# EAGLE board WiFiSensorjj (EAGLE 7.3.0)
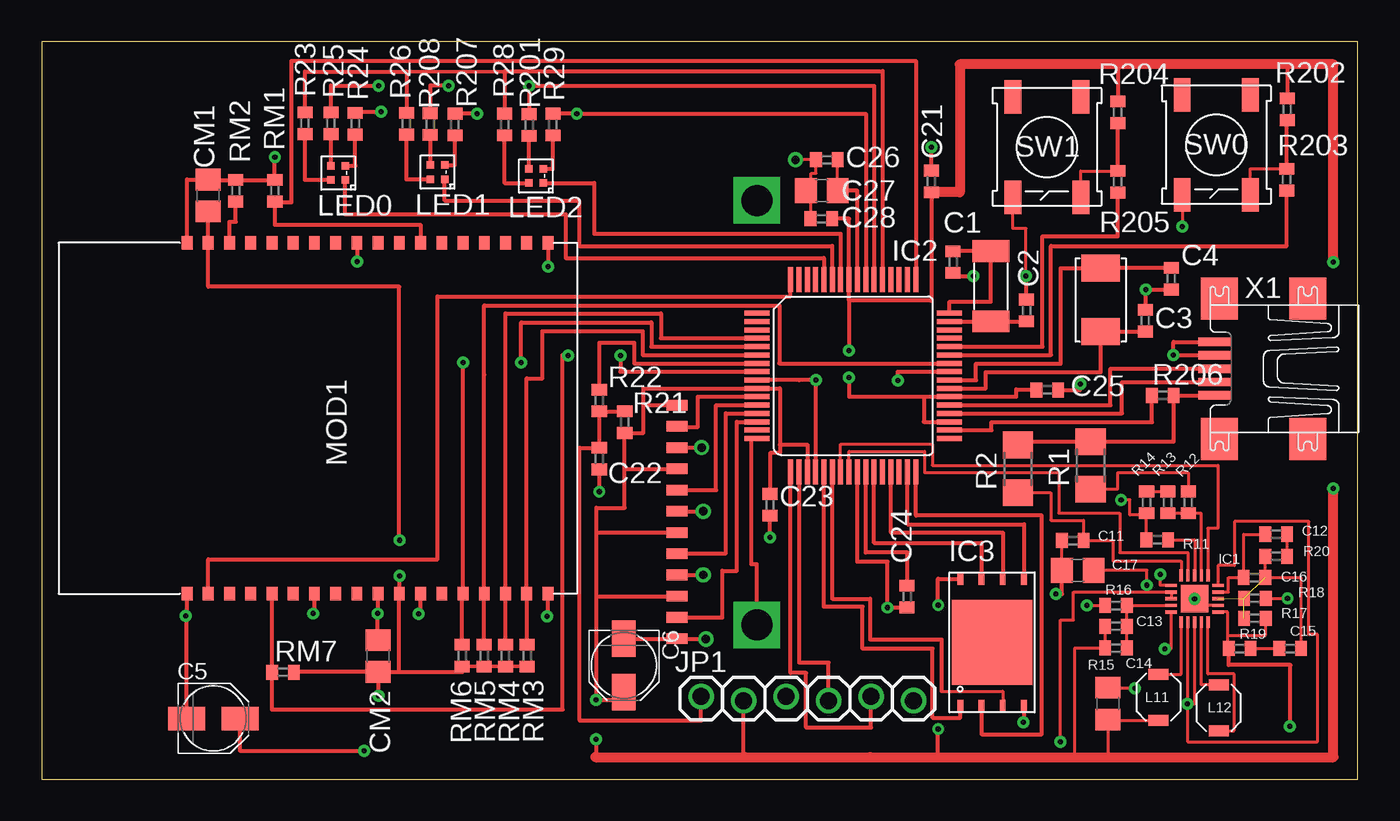
[diagram p0: board, top side]
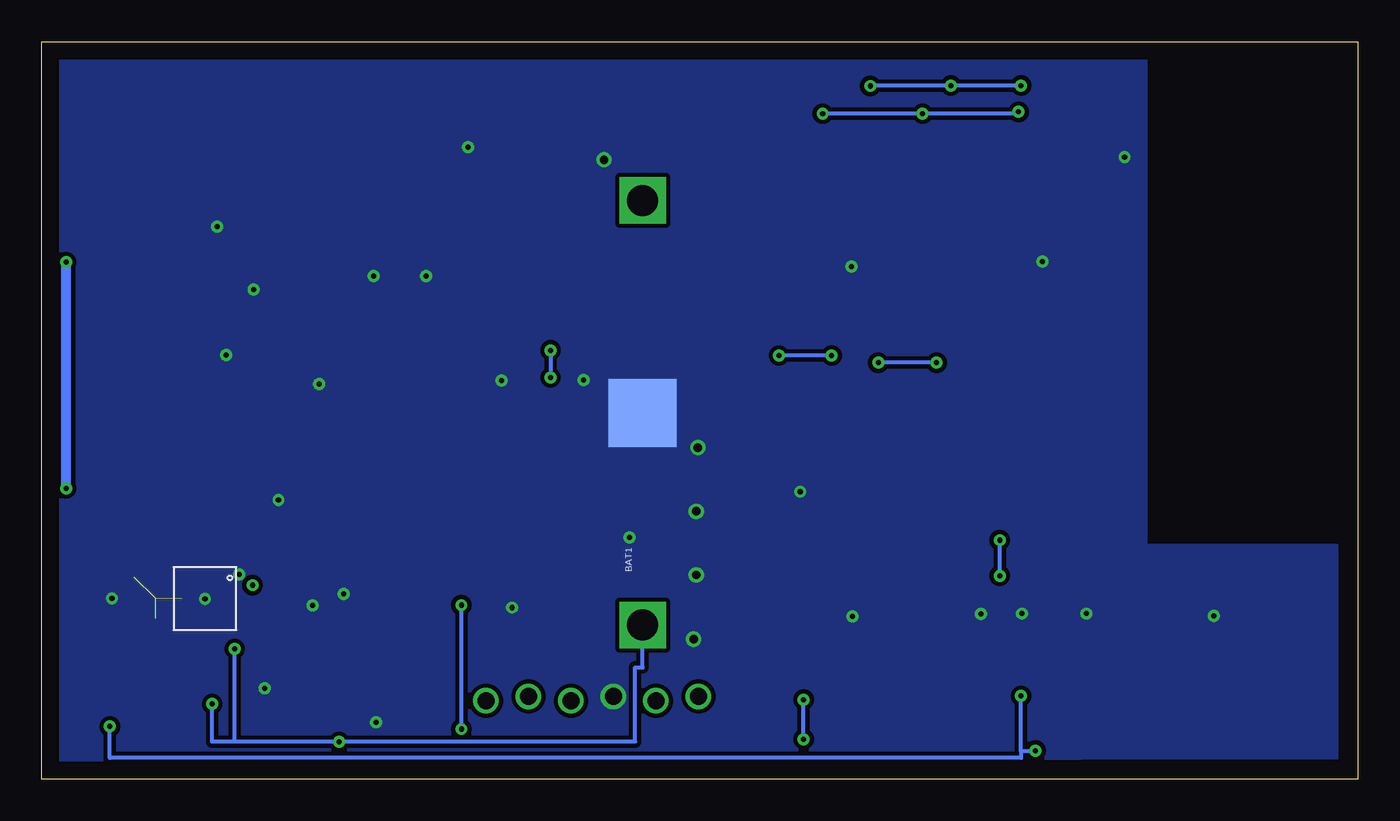
[diagram p1: board, bottom side, seen from below]

Size 78.72 x 44.12 mm. Coordinates in mm from the lower left corner, seen from the top.
Outline: 0,0 78.72,0 78.72,44.12 0,44.12 0,0
Copper layers (1*16): Top 0.035mm / dielectric 1.5mm / Bottom 0.035mm
Design rules "default *": minimum track width 7mil, minimum drill 12mil, track to track 8mil, track to pad 7mil, pad to pad 7mil, via to via 8mil, smd to smd 7mil, copper to edge 40mil, drill to drill 20mil, minimum pad ring 10mil, minimum via ring 8mil, stop-mask expansion 4mil, vias tented up to drill 0mil, thermal gap 10mil

## Footprints (pad centres in the part's own frame; a part is rotated, then mirrored left to right if it is on the bottom)
BATTCON_245MM_PTH = drill 1.854 square: 1 12.7,0; 3 -12.7,0 | smd 4.064 x 4.064: 2 0,0
C0402 = smd 0.7 x 0.9: 1 -0.65,0; 2 0.65,0
PANASONIC_B = smd 2.2 x 1.4: + 1.6,0; - -1.6,0
C0805 = smd 1.3 x 1.5: 1 -0.95,0; 2 0.95,0
QFN20 = smd 0.7 x 0.2: 1 -1.4,0.8; 2 -1.4,0.4; 3 -1.4,0; 4 -1.4,-0.4; 5 -1.4,-0.8; 11 1.4,-0.8; 12 1.4,-0.4; 13 1.4,0; 14 1.4,0.4; 15 1.4,0.8 | smd 0.2 x 0.7: 6 -0.8,-1.4; 7 -0.4,-1.4; 8 0,-1.4; 9 0.4,-1.4; 10 0.8,-1.4; 16 0.8,1.4; 17 0.4,1.4; 18 0,1.4; 19 -0.4,1.4; 20 -0.8,1.4 | smd 1.65 x 1.65: PAD 0,0
TQFP64 = smd 1.5 x 0.3: 1 -5.75,3.75; 2 -5.75,3.25; 3 -5.75,2.75; 4 -5.75,2.25; 5 -5.75,1.75; 6 -5.75,1.25; 7 -5.75,0.75; 8 -5.75,0.25; 9 -5.75,-0.25; 10 -5.75,-0.75; 11 -5.75,-1.25; 12 -5.75,-1.75; 13 -5.75,-2.25; 14 -5.75,-2.75; 15 -5.75,-3.25; 16 -5.75,-3.75; 33 5.75,-3.75; 34 5.75,-3.25; 35 5.75,-2.75; 36 5.75,-2.25; 37 5.75,-1.75; 38 5.75,-1.25; 39 5.75,-0.75; 40 5.75,-0.25; 41 5.75,0.25; 42 5.75,0.75; 43 5.75,1.25; 44 5.75,1.75; 45 5.75,2.25; 46 5.75,2.75; 47 5.75,3.25; 48 5.75,3.75 | smd 0.3 x 1.5: 17 -3.75,-5.75; 18 -3.25,-5.75; 19 -2.75,-5.75; 20 -2.25,-5.75; 21 -1.75,-5.75; 22 -1.25,-5.75; 23 -0.75,-5.75; 24 -0.25,-5.75; 25 0.25,-5.75; 26 0.75,-5.75; 27 1.25,-5.75; 28 1.75,-5.75; 29 2.25,-5.75; 30 2.75,-5.75; 31 3.25,-5.75; 32 3.75,-5.75; 49 3.75,5.75; 50 3.25,5.75; 51 2.75,5.75; 52 2.25,5.75; 53 1.75,5.75; 54 1.25,5.75; 55 0.75,5.75; 56 0.25,5.75; 57 -0.25,5.75; 58 -0.75,5.75; 59 -1.25,5.75; 60 -1.75,5.75; 61 -2.25,5.75; 62 -2.75,5.75; 63 -3.25,5.75; 64 -3.75,5.75
VDFPN8 = smd 0.762 x 0.356: 1 -3.81,1.905; 2 -3.81,0.635; 3 -3.81,-0.635; 4 -3.81,-1.905; 5 3.81,-1.905; 6 3.81,-0.635; 7 3.81,0.635; 8 3.81,1.905 | smd 5.08 x 4.826: NC 0,0
1X06_LOCK = drill 1.016: 1 0,0; 2 2.54,-0.254; 3 5.08,0; 4 7.62,-0.254; 5 10.16,0; 6 12.7,-0.254
L3010 = smd 0.65 x 1.2: P$1 -1.375,0; P$2 1.375,0
1X1 = smd 0.45 x 0.45: A 0.425,0.425; B -0.425,-0.425; G -0.425,0.425; R 0.425,-0.425
MRF24 = smd 0.8 x 0.65: 1 -10.5,13.77; 2 -10.5,12.5; 3 -10.5,11.23; 4 -10.5,9.96; 5 -10.5,8.69; 6 -10.5,7.42; 7 -10.5,6.15; 8 -10.5,4.88; 9 -10.5,3.61; 10 -10.5,2.34; 11 -10.5,1.07; 12 -10.5,-0.2; 13 -10.5,-1.47; 14 -10.5,-2.74; 15 -10.5,-4.01; 16 -10.5,-5.28; 17 -10.5,-6.55; 18 -10.5,-7.82; 19 10.5,-7.82; 20 10.5,-6.55; 21 10.5,-5.28; 22 10.5,-4.01; 23 10.5,-2.74; 24 10.5,-1.47; 25 10.5,-0.2; 26 10.5,1.07; 27 10.5,2.34; 28 10.5,3.61; 29 10.5,4.88; 30 10.5,6.15; 31 10.5,7.42; 32 10.5,8.69; 33 10.5,9.96; 34 10.5,11.23; 35 10.5,12.5; 36 10.5,13.77
ECX39 = smd 1.3 x 2.2: P$1 -2.1,0; P$2 2.1,0
CX532 = smd 1.6 x 2.3: P$1 -1.9,0; P$2 1.9,0
R1206 = smd 1.6 x 1.803: 1 -1.422,0; 2 1.422,0
R0402 = smd 0.7 x 0.9: 1 -0.65,0; 2 0.65,0
BS3N = smd 2 x 1: 1 -3,-2.035; 2 -3,2.035; P$1 3,2.035; P$2 3,-2.035
12-127 = smd 0.635 x 1.27: P$1 -6.985,0; P$2 -5.715,0; P$3 -4.445,0; P$4 -3.175,0; P$5 -1.905,0; P$6 -0.635,0; P$7 0.635,0; P$8 1.905,0; P$9 3.175,0; P$10 4.445,0; P$11 5.715,0; P$12 6.985,0
UX60A-MB-5ST = smd 2 x 0.5: 1 2.25,1.6; 2 2.25,0.8; 3 2.25,0; 4 2.25,-0.8; 5 2.25,-1.6 | smd 2.2 x 2.5: M1 -3.3,-4.2; M2 -3.3,4.2; M3 2,4.2; M4 2,-4.2

## Placement (x,y rotation side)
BAT1  [BATTCON_245MM_PTH]  42.77,21.92 90 bottom
C1  16pF  [C0402]  54.51,30.94 90 top
C2  16pF  [C0402]  58.9,28.04 270 top
C3  12pF  [C0402]  66.01,27.43 270 top
C4  12pF  [C0402]  67.56,29.95 90 top
C5  33uF  [PANASONIC_B]  10.26,3.63 0 top
C6  10uF  [PANASONIC_B]  34.82,6.81 270 top
C11  1UF  [C0402]  61.67,14.27 0 top
C12  330pF  [C0402]  73.84,14.66 0 top
C13  10pF  [C0402]  64.26,9.14 180 top
C14  10UF  [C0805]  63.78,4.52 270 top
C15  33pF  [C0402]  74.68,7.82 180 top
C16  10pF  [C0402]  72.54,12.06 0 top
C17  10UF  [C0805]  61.98,12.5 0 top
C21  .1uF  [C0402]  53.21,35.76 270 top
C22  .1uF  [C0402]  33.35,19.18 90 top
C23  .1uf  [C0402]  43.56,16.41 90 top
C24  .1UF  [C0402]  51.77,10.92 90 top
C25  C-ERC0402  [C0402]  60.15,23.29 180 top
C26  .1UF  [C0402]  46.96,37.06 0 top
C27  10UF  [C0805]  46.66,35.2 0 top
C28  .1uf  [C0402]  46.63,33.53 0 top
CM1  10UF  [C0805]  9.96,34.92 270 top
CM2  10uF  [C0805]  20.12,7.37 270 top
IC1  LTC3558  [QFN20]  68.96,10.79 0 top
IC2  PICMX32695F512H  [TQFP64]  48.54,24.13 0 top
IC3  M25P16  [VDFPN8]  56.85,8.18 90 top
JP1  [1X06_LOCK]  39.45,4.95 0 top
L11  4.7uH  [L3010]  66.8,4.9 270 top
L12  2.2uH  [L3010]  70.41,4.27 270 top
LED0  [1X1]  17.73,36.27 270 top
LED1  [1X1]  23.67,36.32 270 top
LED2  [1X1]  29.57,36.09 270 top
MOD1  MRF24WG0MA/MB  [MRF24]  16.51,21.59 270 top
OSC1  32.768kHz  [ECX39]  56.77,29.49 270 top
OSC2  8MHz  [CX532]  63.35,28.68 90 top
R1  0  [R1206]  62.74,18.77 90 top
R2  0  [R1206]  58.39,18.57 90 top
R11  1k74  [R0402]  66.73,14.33 180 top
R12  105k  [R0402]  68.58,16.56 90 top
R13  12k7  [R0402]  67.36,16.56 270 top
R14  100k  [R0402]  66.09,16.56 90 top
R15  313k  [R0402]  64.26,7.85 180 top
R16  100k  [R0402]  64.26,10.39 0 top
R17  313k  [R0402]  72.57,9.63 0 top
R18  100k  [R0402]  72.57,10.82 180 top
R19  121k  [R0402]  71.65,7.82 180 top
R20  15k  [R0402]  73.84,13.34 180 top
R21  10k  [R0402]  34.87,21.36 270 top
R22  100  [R0402]  33.35,22.66 270 top
R23  100  [R0402]  15.75,39.24 270 top
R24  100  [R0402]  18.75,39.22 270 top
R25  100  [R0402]  17.3,39.24 270 top
R26  100  [R0402]  21.82,39.22 270 top
R28  100  [R0402]  27.69,39.17 270 top
R29  100  [R0402]  30.58,39.17 270 top
R201  100  [R0402]  29.16,39.14 270 top
R202  10k  [R0402]  74.5,40.08 90 top
R203  470  [R0402]  74.47,35.86 90 top
R204  10k  [R0402]  64.36,39.9 90 top
R205  470  [R0402]  64.36,35.74 90 top
R206  R-ERR0402  [R0402]  67.06,22.96 0 top
R207  100  [R0402]  24.71,39.17 270 top
R208  100  [R0402]  23.24,39.19 270 top
RM1  4k7  [R0402]  13.94,35.2 270 top
RM2  4k7  [R0402]  11.61,35.2 270 top
RM3  4k7  [R0402]  29.03,7.39 270 top
RM4  4k7  [R0402]  27.74,7.39 270 top
RM5  4k7  [R0402]  26.47,7.39 270 top
RM6  4k7  [R0402]  25.15,7.39 270 top
RM7  4k7  [R0402]  14.43,6.4 0 top
SW0  [BS3N]  70.26,37.95 90 top
SW1  [BS3N]  60.12,37.82 90 top
U$11  12_127  [12-127]  38,15.39 270 top
X1  usb  [UX60A-MB-5ST]  72.44,24.56 180 top

## Library data of the parts
BAT1 JP1 = SparkFun
C1-C6 C11-C17 C21-C28 CM1 CM2 L11 L12 R1 R2 R11-R13 R15-R26 R28 R29 R201-R208 RM1-RM7 = rcl
IC1 = linear-technology
IC2 MOD1 = microchip
IC3 = st-microelectronics
LED0 LED1 LED2 = led
OSC1 OSC2 = crystal; DIGIPART: XC1658CT-ND
R14 = rcl; NTC: NTC
SW0 SW1 = switch-omron
U$11 = con-molex
X1 = con-hirose

## Nets
3V3: C5.+ CM1.2 CM2.2 IC1.11 MOD1.17 MOD1.29 R17.2 R19.2 RM3.2 RM4.2 RM5.2 RM6.2 RM7.2
+3V3: C6.+ C13.2 C14.2 C21.2 C23.2 C25.2 C28.2 IC2.10 IC2.19 IC2.35 IC2.38 IC2.57 IC3.8 JP1.2 L11.P$2 R15.2 R21.2 R202.2 R204.2 U$11.P$1 U$11.P$4 U$11.P$7 U$11.P$10
AN1: IC2.15
AN2: IC2.14 U$11.P$11
AN3: IC2.13 U$11.P$8
AN4: IC2.12 U$11.P$5
AN5: IC2.11 U$11.P$2
AN15/CN12/RB15: IC2.30
BLUE: IC2.54 R25.1 R201.1 R208.1
CHRG: IC1.19 IC2.24
CS_WIFI: IC2.8 MOD1.23 RM7.1
D+: IC2.37 X1.3
D-: IC2.36 X1.2
DBGRX: MOD1.26
DBGTX: MOD1.27
DGND: BAT1.2 C1.1 C2.1 C3.1 C4.1 C5.- C6.- C11.1 C14.1 C17.1 C21.1 C22.1 C23.1 C24.1 C25.1 C26.1 C27.1 C28.1 CM1.1 CM2.1 IC1.1 IC1.12 IC1.PAD IC2.9 IC2.20 IC2.25 IC2.41 IC3.4 JP1.3 MOD1.1 MOD1.10 MOD1.18 MOD1.19 MOD1.25 MOD1.28 MOD1.30 MOD1.36 R11.2 R14.1 R16.1 R18.1 RM1.1 RM2.1 SW0.2 SW1.2 U$11.P$3 U$11.P$6 U$11.P$9 U$11.P$12 X1.4 X1.5
GREEN: IC2.55 R24.1 R29.1 R207.1
H: IC2.27 IC3.7
HIBERNATE: IC2.64 MOD1.20
HP: IC1.16 IC2.23
ICSPGC: IC2.17 JP1.5
ICSPGD: IC2.18 JP1.4
INT_WIFI: IC2.42 MOD1.33 RM5.1
LED0: IC2.60 LED0.A
LED1: IC2.59 LED1.A
LED2: IC2.58 LED2.A
MCLR: C22.2 JP1.1 R21.1 R22.2
N$1: R1.1 R12.2
N$2: IC1.18 R11.1
N$3: C11.2 IC1.20 R2.1
N$4: IC1.17 R12.1 R13.2
N$5: R13.1 R14.2
N$13: IC1.9 L12.P$1
N$14: IC1.10 L12.P$2
N$15: IC1.6 L11.P$1
N$18: C15.2 R19.1
N$19: C15.1 C16.2 IC1.13 R17.1 R18.2 R20.2
N$20: C12.2 R20.1
N$21: C12.1 C16.1 IC1.14
N$24: IC2.34 R206.1
N$25: IC2.7 R22.1
N$26: R202.1 R203.2 SW0.1
N$29: C24.2 IC2.26
N$31: C26.2 C27.2 IC2.56
N$33: R204.1 R205.2 SW1.1
N$34: LED0.R R23.2
N$40: LED0.G R24.2
N$41: MOD1.16 RM2.2
N$42: LED0.B R25.2
N$43: LED1.R R26.2
N$44: LED1.G R207.2
N$45: LED1.B R208.2
N$46: LED2.R R28.2
N$47: LED2.G R29.2
N$48: LED2.B R201.2
N$49: C13.1 IC1.4 R15.1 R16.2
OSC1: C3.2 IC2.39 OSC2.P$1
OSC2: C4.2 IC2.40 OSC2.P$2
RED: IC2.53 R23.1 R26.1 R28.1
RST_WIFI: IC2.49 MOD1.7 RM1.2
RTC1: C2.2 IC2.47 OSC1.P$2
RTC2: C1.2 IC2.48 OSC1.P$1
SCK2: IC2.4 MOD1.34 RM4.1
SCL5/SDO4/U2TX: IC2.32 IC3.2
SDA5/SDI4/U2RX: IC2.31 IC3.5
SDI2: IC2.5 MOD1.32 RM6.1
SDO2: IC2.6 MOD1.35 RM3.1
SS4/U5RX/U2CTS: IC2.21 IC3.1
SSCK4/U5TX/U2RTS: IC2.29 IC3.6
SW0: IC2.43 R203.1
SW1: IC2.44 R205.1
VBAT: BAT1.3 C17.2 IC1.2 IC1.3 IC1.5 IC1.7 IC1.8 IC1.15 IC2.16
VBUS: R1.2 R2.2 R206.2 X1.1
W: IC2.22 IC3.3

## Tracks (layer width: path | path; a pad name or v marks a point on that pad's centre or on a via)
3V3  (via drill 0.3)
  Top 0.178: IC1.11 70.94,9.99 70.94,8.84 70.94,8.61 | 70.94,8.61 73.22,8.61 R17.2 | R19.2 70.94,7.82 70.94,8.61
  Top 0.203: RM6.2 RM5.2 RM4.2 RM3.2
  Top 0.254: CM1.2 MOD1.17 9.96,29.46 21.39,29.46 21.39,14.3 v21.41,14.3 | CM2.2 20.12,6.4 | R19.2 71,6.83 74.7,6.83 74.7,3.15 v74.65,3.15 | v20.14,4.98 20.14,6.42 CM2.2 | 21.39,6.42 MOD1.29 21.41,11.09 v21.41,12.17 | CM2.2 21.39,6.42 | RM7.2 15.08,6.42 CM2.2 | RM6.2 25.15,6.42 21.39,6.42 | C5.+ 11.86,1.7 v19.28,1.7
  Bottom 0.254: v74.65,3.15 74.65,1.27 20.14,1.27 20.14,1.68 | 20.14,1.68 v20.14,4.98 | v21.41,12.17 v21.41,14.3 | v19.28,1.7 19.28,1.68 20.14,1.68
+3V3  (via drill 0.3)
  Top 0.178: C13.2 R15.2 61.8,7.85 61.8,1.32 | L11.P$2 63.78,3.53 C14.2 63.8,3.57 63.8,1.32
  Top 0.254: C28.2 48.29,33.53 IC2.57 48.28,28.63 | IC2.38 54.29,22.86 | IC2.38 58.29,22.88 58.29,23.32 59.5,23.32 C25.2 | 49.55,1.32 49.61,1.32 | C21.2 53.21,28.63 48.28,28.63 | R204.2 64.36,42.77 64.44,42.77 | R202.2 74.5,42.77 74.52,42.77 | JP1.2 41.99,1.32 42.04,1.32 | 52.76,22.89 52.76,21.38 IC2.35 | 52.76,22.89 IC2.38 | IC3.8 53.62,11.99 v53.62,10.41 | 53.62,1.32 v53.62,3 | 34.87,18.57 34.87,16.23 33.17,16.23 33.17,14.76 | 33.17,10.95 33.17,4.75 v33.15,4.75 34.82,4.75 C6.+ | 33.17,10.95 33.17,14.76 | v33.15,2.39 33.15,1.32 33.12,1.32 | 35.99,22.38 35.99,20.73 34.87,20.73 R21.2 34.87,18.57 | 35.99,22.38 U$11.P$1 | 35.99,22.38 35.99,23.38 IC2.10 44.15,23.38 44.15,20.02 | 34.87,18.57 U$11.P$4 | 33.17,14.76 U$11.P$7 | 33.17,10.95 U$11.P$10 | C23.2 43.56,19.51 44.15,19.51 44.15,20.02 | 44.15,20.02 45.8,20.02 IC2.19 | 52.76,22.89 48.28,22.89 v48.28,24.03 | 48.28,28.63 v48.28,25.65
  Top 0.61: v77.27,17.4 77.27,1.32 63.8,1.32 61.8,1.32 53.62,1.32 49.55,1.32 42.04,1.32 33.12,1.32 | v77.27,30.94 77.27,42.77 74.52,42.77 64.44,42.77 54.91,42.77 54.91,35.11 C21.2
  Bottom 0.254: v53.62,3 v53.62,10.41 | v33.15,2.39 v33.15,4.75 | v48.28,25.65 v48.28,24.03
  Bottom 0.61: v77.27,17.4 v77.27,30.94
AN2
  Top 0.254: IC2.14 41.58,21.38 41.58,12.47 40.72,12.47 40.72,9.68 U$11.P$11
AN3
  Top 0.254: IC2.13 40.92,21.88 40.92,13.51 38,13.51 U$11.P$8
AN4
  Top 0.254: IC2.12 40.34,22.38 40.34,17.3 U$11.P$5
AN5
  Top 0.254: IC2.11 39.24,22.88 39.24,21.08 38,21.08 U$11.P$2
BLUE  (via drill 0.3)
  Top 0.254: R201.1 v29.16,41.48 49.79,41.48 IC2.54 | R25.1 17.3,41.5 v20.14,41.5 | R208.1 23.24,41.5 v24.33,41.5
  Bottom 0.254: v29.16,41.48 24.33,41.48 v24.33,41.5 v20.14,41.5
CHRG
  Top 0.178: IC1.19 68.56,13.56 64.49,13.56 64.49,15.93 60.83,15.93 60.83,18.34 52.81,18.34 52.81,19.61 48.28,19.61 IC2.24
CS_WIFI  (via drill 0.3)
  Top 0.254: MOD1.23 RM7.1 | RM7.1 13.79,6.71 | IC2.8 34.62,24.38 v34.62,25.35 | v31.47,25.35 31.14,25.35 31.17,4.17 13.78,4.17 RM7.1
  Bottom 0.254: v31.47,25.35 v34.62,25.35
D+
  Top 0.254: X1.3 63.93,24.56 63.93,22.38 IC2.37
D-
  Top 0.254: IC2.36 64.62,21.88 64.62,23.75 70.19,23.75 X1.2
DGND  (via drill 0.3, 0.5)
  Top 0.178: IC1.12 68.96,10.39 IC1.PAD | C28.1 45.98,34.93 C27.1 | 45.98,35.2 46.02,35.24 46.02,36.25 46.31,36.25 C26.1 v45.09,37.06 | R18.1 v74.52,10.82 | IC1.1 66.9,11.6 v66.9,12.24 | v62.51,10.39 R16.1 | C17.1 C11.1 | C14.1 65.38,5.47 v65.38,5.44 | R14.1 66.08,15.91 R11.2 66.08,15.8 65.1,15.8 65.1,16.71 v64.57,16.71 | SW1.2 58.09,32.94 58.88,32.94 v58.88,30.1 | SW0.2 v68.22,33.07
  Top 0.203: 20.12,8.02 CM2.1 20.09,8.02
  Top 0.254: MOD1.19 8.69,9.78 v8.61,9.78 8.66,9.78 C5.- | MOD1.25 16.31,9.91 v16.23,9.91 | MOD1.28 20.12,9.91 v20.09,9.91 20.09,8.02 | MOD1.36 30.28,9.73 v30.23,9.73 | MOD1.30 22.66,9.88 v22.53,9.88 | C27.1 45.98,35.2 | v13.95,37.21 RM1.1 RM2.1 9.96,35.85 CM1.1 8.69,35.88 MOD1.18 | MOD1.1 v30.28,30.66 | C25.1 62.13,23.29 v62.13,23.65 | X1.5 67.69,26.16 v67.69,25.38 | v67.69,25.38 70.19,25.38 X1.4 | MOD1.10 18.87,32.09 v18.87,30.96 | IC2.9 45.31,23.88 v46.3,23.88 46.3,18.38 IC2.20 | IC2.41 51.21,24.38 v51.21,23.85 | IC3.4 58.75,3.35 v58.73,3.4 | C21.1 v53.21,37.82 | v67.69,25.38 67.69,25.64 | C3.1 66.04,28.08 v66.04,29.29 67.56,29.29 C4.1 | C1.1 54.51,30.1 v55.73,30.1 | C2.1 58.9,30.1 v58.88,30.1 | v33.35,17.2 C22.1 | U$11.P$3 v39.47,19.84 | U$11.P$6 v39.57,16.03 | v39.73,8.38 39.73,8.41 U$11.P$12 C6.- | U$11.P$9 v39.57,12.22 | IC2.25 48.79,13.01 50.6,13.01 v50.6,10.26 50.75,10.27 C24.1 | v43.56,14.45 C23.1 | 61.01,12.5 C17.1 61.03,11.07 v60.66,11.07 | C6.-
  other vias: 68.96,10.79
  pour Bottom (isolate 0.254, no thermals): 1.27,1.27 77.62,1.12 77.62,43.03 12.7,43.18 12.7,13.97 1.27,13.97
GREEN  (via drill 0.3)
  Top 0.254: R29.1 v32,39.82 49.29,39.82 IC2.55 | R24.1 18.75,39.93 v20.3,39.93 | v26.04,39.82 R207.1
  Bottom 0.254: v20.3,39.93 20.3,39.82 v26.04,39.82 v32,39.82
H
  Top 0.254: IC2.27 49.79,14.15 56.21,14.15 IC3.7
HIBERNATE
  Top 0.254: MOD1.20 9.96,13.16 23.67,13.16 23.67,28.88 44.78,28.88 IC2.64
HP
  Top 0.178: IC2.23 47.79,20.04 53.26,20.04 53.26,18.77 70.36,18.77 70.36,15.01 69.75,15.01 69.75,12.2 IC1.16
ICSPGC
  Top 0.254: IC2.17 44.79,6.35 45.72,6.35 45.72,3.1 49.61,3.1 JP1.5
ICSPGD
  Top 0.254: JP1.4 47.07,6.96 45.31,6.96 45.31,18.38 IC2.18
INT_WIFI
  Top 0.254: RM5.1 MOD1.33 26.47,24.18 26.47,24.21 26.47,28.35 44.12,28.35 44.12,24.88 IC2.42
LED0
  Top 0.254: LED0.A 18.15,33.81 31.34,33.81 31.34,31.19 46.79,31.19 IC2.60
LED1
  Top 0.254: LED1.A 24.1,34.62 32.13,34.62 32.13,31.9 47.27,31.9 47.27,29.88 IC2.59
LED2
  Top 0.254: LED2.A 33.05,35.67 33.05,32.64 47.79,32.64 IC2.58
MCLR
  Top 0.254: JP1.1 39.45,3.5 32.18,3.5 32.18,19.83 C22.2 R22.2 R21.1
N$1
  Top 0.178: R12.2 68.58,18.34 64.36,18.34 64.36,17.35 R1.1
N$2
  Top 0.178: R11.1 68.96,14.33 IC1.18
N$3
  Top 0.178: IC1.20 68.16,13.06 64.08,13.06 64.08,14.28 C11.2 62.32,15.49 60.35,15.49 60.35,17.14 R2.1
N$4
  Top 0.178: R13.2 R12.1 69.36,15.91 IC1.17
N$5
  Top 0.178: R14.2 R13.1
N$13
  Top 0.178: IC1.9 69.36,5.64 L12.P$1
N$14
  Top 0.178: IC1.10 69.76,6.3 71.32,6.3 71.32,2.89 L12.P$2
N$15
  Top 0.178: IC1.6 68.16,6.28 L11.P$1
N$18
  Top 0.178: R19.1 C15.2
N$19  (3 unrouted)
  Top 0.178: C15.1 75.33,12.06 C16.2 R20.2
N$20
  Top 0.178: C12.2 R20.1
N$21
  Top 0.178: IC1.14 70.99,11.2 70.99,12.06 C16.1 71.89,14.66 C12.1
N$24
  Top 0.254: IC2.34 arc-90 IC2.34 56.82,20.88 56.82,21.36 66.41,21.36 R206.1
N$25
  Top 0.254: R22.1 33.35,26.11 35.43,26.11 35.43,24.88 IC2.7
N$26
  Top 0.178: SW0.1 72.29,36.52 R203.2
  Top 0.254: R203.2 74.47,39.43 R202.1
N$29
  Top 0.254: IC2.26 49.29,13.56 51.79,13.56 51.79,11.57 C24.2
N$31
  Top 0.178: C27.2 C26.2
  Top 0.254: C27.2 48.79,35.2 IC2.56
N$33
  Top 0.178: SW1.1 62.16,36.39 R205.2
  Top 0.254: R205.2 R204.1
N$34
  Top 0.254: LED0.R 15.75,35.85 R23.2
N$40
  Top 0.254: LED0.G 18.75,36.7 R24.2
N$41
  Top 0.254: MOD1.16 11.23,33.35 11.61,33.35 RM2.2
N$42
  Top 0.254: LED0.B R25.2
N$43
  Top 0.254: LED1.R 21.82,35.9 R26.2
N$44
  Top 0.254: LED1.G 24.71,36.75 R207.2
N$45
  Top 0.254: R208.2 LED1.B
N$46
  Top 0.254: LED2.R 27.69,35.67 R28.2
N$47
  Top 0.254: LED2.G 30.58,36.52 R29.2
N$48
  Top 0.254: LED2.B 29.16,36.52 R201.2
N$49
  Top 0.178: IC1.4 R16.2 C13.1 R15.1
OSC1
  Top 0.254: IC2.39 56.46,23.38 56.46,24.36 63.35,24.36 OSC2.P$1 C3.2
OSC2
  Top 0.254: IC2.40 55.88,23.88 55.88,24.87 60.96,24.87 60.96,30.58 OSC2.P$2 63.35,30.6 C4.2
RED
  Top 0.254: 27.69,42.37 R28.1 | IC2.53 50.29,42.37 27.69,42.37 | R23.1 15.75,42.34 21.82,42.34 | 21.82,42.34 27.69,42.37 | 21.82,42.34 R26.1
RST_WIFI
  Top 0.254: MOD1.7 22.66,33.17 13.95,33.17 RM1.2 13.95,34.52 14.94,34.52 14.94,42.98 52.29,42.98 IC2.49
RTC1
  Top 0.254: IC2.47 OSC1.P$2 C2.2
RTC2
  Top 0.254: C1.2 OSC1.P$1 56.77,28.57 54.3,28.57 54.3,27.88 IC2.48
SCK2
  Top 0.254: RM4.1 MOD1.34 27.74,27.86 37.03,27.86 37.03,26.38 IC2.4
SCL5/SDO4/U2TX
  Top 0.254: IC3.2 56.21,2.69 59.82,2.69 59.82,15.77 52.3,15.77 IC2.32
SDA5/SDI4/U2RX
  Top 0.254: IC2.31 51.79,15.24 58.75,15.24 IC3.5
SDI2  (via drill 0.3)
  Top 0.254: RM6.1 25.15,11.09 MOD1.32 v25.2,24.92 | v28.68,24.92 28.68,27.33 36.47,27.33 36.47,25.88 IC2.5
  Bottom 0.254: v25.2,24.92 v28.68,24.92
SDO2
  Top 0.254: RM3.1 29.03,11.09 MOD1.35 29.01,23.98 29.95,23.98 29.95,26.8 35.94,26.8 35.94,25.38 IC2.6
SS4/U5RX/U2CTS
  Top 0.254: IC2.21 46.79,10.31 49.1,10.31 49.1,7.8 53.29,7.8 53.29,3.68 54.94,3.68 IC3.1
SSCK4/U5TX/U2RTS
  Top 0.254: IC3.6 57.48,14.76 50.8,14.76 IC2.29
SW0
  Top 0.254: IC2.43 60.38,25.38 60.38,31.9 74.47,31.9 R203.1
SW1
  Top 0.254: IC2.44 59.87,25.88 59.87,32.49 64.36,32.49 R205.1
VBAT  (via drill 0.3)
  Top 0.178: IC1.3 IC1.2 66.12,11.2 | IC1.8 68.96,4.5 v68.53,4.5 | IC1.5 67.56,7.8 v67.18,7.8 | IC1.7 68.56,4.5 v68.53,4.5 | IC1.15 70.36,12.78 71.35,12.78 71.35,15.42 75.79,15.42 75.79,8.66 76.33,8.66 76.33,2.23 68.53,2.23 v68.53,4.5 | C17.2 66.12,12.5 v66.12,11.61 66.12,11.2 | 66.12,11.2 61.72,11.2 61.72,9.53 60.94,9.53 v60.94,2.23
  Top 0.254: 42.77,20.38 IC2.16 42.44,20.38 42.44,12.85 42.77,12.85 BAT1.3
  Bottom 0.254: BAT1.3 42.77,6.68 43.23,6.68 43.23,2.23 v60.94,2.23 67.18,2.23 | 67.18,2.23 68.53,2.23 v68.53,4.5 | 67.18,2.23 v67.18,7.8
VBUS
  Top 0.254: R2.2 58.4,20.19 R1.2 67.71,20.19 R206.2 X1.1 | X1.1
W
  Top 0.178: IC3.3 57.48,5.26 53.82,5.26
  Top 0.254: 53.82,5.26 53.82,8.36 49.55,8.36 49.55,10.79 47.29,10.79 IC2.22